# EAGLE board SensorBoard (EAGLE 9.4.0)
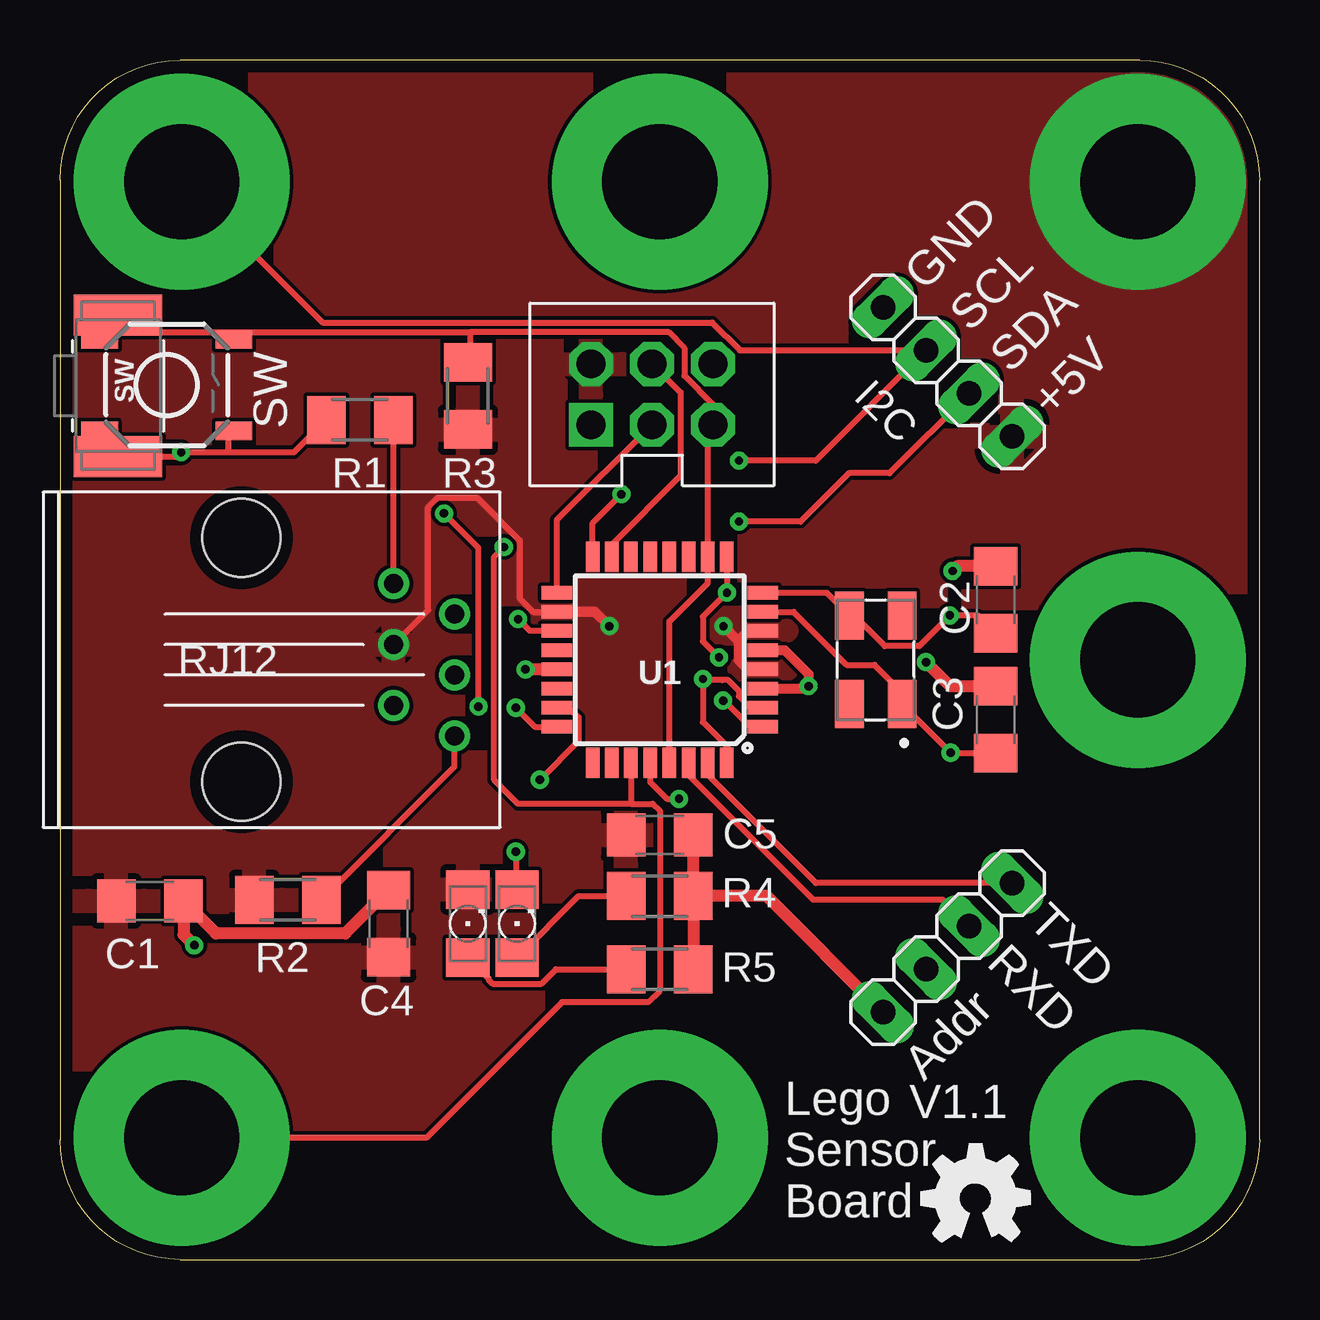
[diagram p0: board, top side]
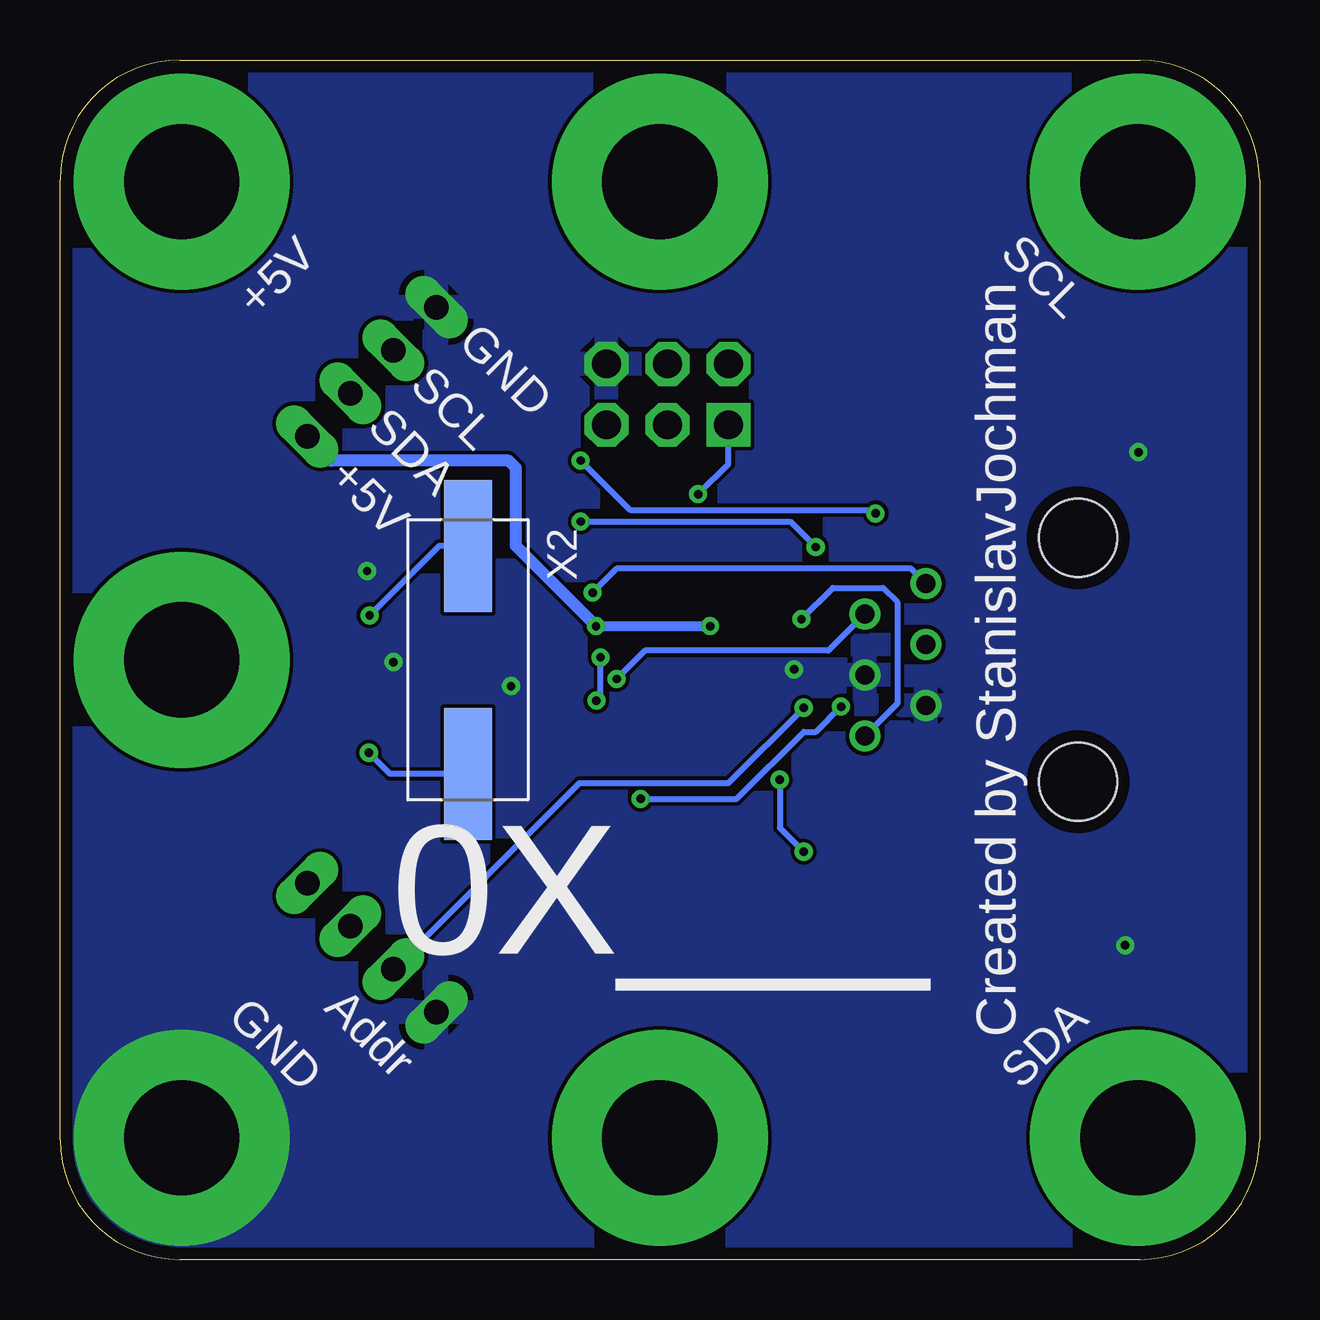
[diagram p1: board, bottom side, seen from below]

Size 50 x 50 mm. Coordinates in mm from the lower left corner, seen from the top.
Outline: 5,0 45,0 arc90 50,5 50,45 arc90 45,50 5,50 arc90 0,45 0,5 arc90 5,0
Copper layers (1*16): Top 0.035mm / dielectric 1.5mm / Bottom 0.035mm
Design rules "default *": minimum track width 6mil, minimum drill 0.35mm, track to track 6mil, track to pad 6mil, pad to pad 6mil, via to via 6mil, smd to smd 6mil, copper to edge 20mil, drill to drill 6mil, minimum pad ring 10mil, minimum via ring 8mil, stop-mask expansion 4mil, vias tented up to drill 0mil, thermal gap 10mil

## Footprints (pad centres in the part's own frame; a part is rotated, then mirrored left to right if it is on the bottom)
C1206 = smd 1.6 x 1.8: 1 -1.4,0; 2 1.4,0
1X04 = drill 1.016 long: 1 -3.81,0; 2 -1.27,0; 3 1.27,0; 4 3.81,0
ICSP_HEADER = drill 1.2 pad 1.829 square: 1 -1.27,2.54 | drill 1.2 pad 1.829 octagon: 2 1.27,2.54; 3 -1.27,0; 4 1.27,0; 5 -1.27,-2.54; 6 1.27,-2.54
1206 = smd 1.6 x 1.803: A -1.422,0; C 1.422,0
M1206 = smd 1.6 x 2: 1 -1.4,0; 2 1.4,0
RJ12 = drill 0.8: 1 -8.89,-3.175; 2 -6.35,-1.905; 3 -8.89,-0.635; 4 -6.35,0.635; 5 -8.89,1.905; 6 -6.35,3.175 | hole 3.25: 0,-5.08; 0,5.08
BTN_CK_KSS = smd 1.7 x 3.7: P$1 -2.95,0; P$2 2.95,0
TACTILE_SWITCH_SMD_5.2MM = smd 1.524 x 0.762: 1 -2.794,1.905; 2 2.794,1.905; 3 -2.794,-1.905; 4 2.794,-1.905
TQFP32-08 = smd 1.27 x 0.559: 1 -4.293,2.8; 2 -4.293,2; 3 -4.293,1.2; 4 -4.293,0.4; 5 -4.293,-0.4; 6 -4.293,-1.2; 7 -4.293,-2; 8 -4.293,-2.8; 17 4.293,-2.8; 18 4.293,-2; 19 4.293,-1.2; 20 4.293,-0.4; 21 4.293,0.4; 22 4.293,1.2; 23 4.293,2; 24 4.293,2.8 | smd 0.559 x 1.27: 9 -2.8,-4.293; 10 -2,-4.293; 11 -1.2,-4.293; 12 -0.4,-4.293; 13 0.4,-4.293; 14 1.2,-4.293; 15 2,-4.293; 16 2.8,-4.293; 25 2.8,4.293; 26 2,4.293; 27 1.2,4.293; 28 0.4,4.293; 29 -0.4,4.293; 30 -1.2,4.293; 31 -2,4.293; 32 -2.8,4.293
LEGO-1X1 = drill 4.8 pad 9: LEGO 0,0
7B-16.000MAAJ-T = smd 2 x 1.2: 1 -1.85,-1.1; 2 1.85,-1.1; 3 1.85,1.1; 4 -1.85,1.1
FC4SDCBMF16.0-T1 = smd 5.5 x 2: 1 -4.75,0; 2 4.75,0

## Placement (x,y rotation side)
C1  100nf  [C1206]  3.75,14.95 0 top
C2  22pf  [C1206]  39,27.5 90 top
C3  22pf  [C1206]  39,22.5 90 top
C4  100nf  [C1206]  13.7,14 90 top
C5  100uf  [C1206]  25,17.7 0 top
I2C  [1X04]  37,37 135 top
JP1  [ICSP_HEADER]  24.68,36.06 90 top
LED1  POWER  [1206]  17,14 90 top
LED2  STATUS  [1206]  19.05,14 90 top
R1  10K  [M1206]  12.5,35 0 top
R2  1K  [M1206]  9.5,15 0 top
R3  10K  [M1206]  17,36 270 top
R4  1K  [M1206]  25,15.15 0 top
R5  1K  [M1206]  25,12.1 0 top
RJ12  RJ12  [RJ12]  7.56,25 0 bottom
SW  [BTN_CK_KSS]  2.42,36.42 270 top
SW1  [TACTILE_SWITCH_SMD_5.2MM]  4.45,36.45 0 top
U1  ATMEGA328P_TQFP  [TQFP32-08]  25,25 180 top
U$1  LEGO-1X1  [LEGO-1X1]  5.07,44.92 0 top
U$2  OPENSOURCE  [OSHW_5MM]  38.16,2.54 0 top
U$3  LEGO-1X1  [LEGO-1X1]  5.07,5.07 0 top
U$4  LEGO-1X1  [LEGO-1X1]  44.92,5.07 0 top
U$5  LEGO-1X1  [LEGO-1X1]  44.92,44.92 0 top
U$6  LEGO-1X1  [LEGO-1X1]  25,5.07 0 top
U$7  LEGO-1X1  [LEGO-1X1]  25,44.92 0 top
U$9  LEGO-1X1  [LEGO-1X1]  44.92,25 0 top
UART  [1X04]  37,13 225 top
X1  7B-16.000MAAJ-T  [7B-16.000MAAJ-T]  34,25 90 top
X2  FC4SDCBMF16.0-T1  [FC4SDCBMF16.0-T1]  33,25 270 bottom

## Library data of the parts
C1-C5 = rcl; SPICEPREFIX: C
I2C UART = pinhead
JP1 U$1-U$7 U$9 = Cing Library
LED1 LED2 = led
R1-R5 = rcl; SPICEPREFIX: R
RJ12 = con-rj
SW = adafruit
SW1 = SparkFun-Switches; PROD_ID: SWCH-08247; SF_SKU: COM-08720
U1 = SparkFun-IC-Microcontroller; PROD_ID: IC-09069
X1 = Crystals; CRAETED_BY: PCBLayout.com; DIGIKEY_PART_NUMBER: 887-1104-2-ND; MANUFACTURER: TXC CORPORATION; MPN: 7B-16.000MAAJ-T; PACKAGE: SMD 4
X2 = Crystals; CREATED_BY: PCBLayout.com; DIGIKEY_PART_NUMBER: 631-1017-2-ND; MANUFACTURER: Fox Electronics; MPN: FC4SDCBMF16.0-T1; PACKAGE: SMD

## Nets
+5V: C1.1 C4.1 C5.1 I2C.1 JP1.2 LED1.C R2.1 R3.2 RJ12.4 U1.4 U1.6 U1.18 U$5.LEGO
ADDR_SENSE: U1.24 UART.3
GND: C1.2 C2.2 C3.2 C4.2 C5.2 I2C.4 JP1.6 R1.1 R4.2 R5.2 RJ12.2 RJ12.3 SW1.3 SW1.4 SW.P$2 U1.3 U1.5 U1.21 U$4.LEGO UART.4
MISO: JP1.1 U1.16
MOSI: JP1.4 U1.15
N$1: C2.1 U1.8 X1.3 X2.1
N$2: C3.1 U1.7 X1.1 X2.2
N$3: LED2.A R4.1
N$4: LED1.A R5.1
RESET: JP1.5 R3.1 SW1.1 SW1.2 SW.P$1 U1.10 U1.29
RXD: U1.30 UART.2
S_A: R2.2 RJ12.1 U1.19
S_RX: RJ12.5 U1.2 U1.32
S_TX: R1.2 RJ12.6 U1.1 U1.9
SCK: JP1.3 U1.17
SCL: I2C.3 U1.28 U$1.LEGO
SDA: I2C.2 U1.27 U$3.LEGO
STATUS: LED2.C U1.23
TXD: U1.31 UART.1

## Tracks (layer width: path | path; a pad name or v marks a point on that pad's centre or on a via)
+5V  (via drill 0.35)
  Top 0.254: U1.18 19.71,27 19.16,27.56 19.16,29.97 17.38,31.75 15.73,31.75 15.35,31.37 15.35,27.07 RJ12.4
  Top 0.406: U1.6 28.68,26.2 28.3,25.83 | U1.4 28.68,24.6 28.3,24.97 28.3,25.83 | 28.3,25.83 28.23,25.83 v27.66,26.4 | v22.9,26.4 22.3,27 U1.18
  Bottom 0.406: v27.66,26.4 v22.9,26.4
  Bottom 0.508: v27.66,26.4 31,29.74 31,33 31.3,33.3 38.69,33.3 I2C.1
  pour Top: -5,55 55,55 55,-5 -5,-5
ADDR_SENSE  (via drill 0.35)
  Top 0.254: v19,23 19.8,22.2 U1.24
  Bottom 0.254: v19,23 22.14,19.86 28.35,19.86 UART.3
GND  (via drill 0.35)
  Top 0.254: R1.1 9.75,33.65 7,33.65 | 7,33.65 v5.05,33.65 4.87,33.47 SW.P$2 1.66,34.23 SW1.3 | 29.39,23.9 U1.3 | SW1.4 7,34.3 7,33.65
  Top 0.406: U1.5 30.2,25.4 31.2,24.4 v31.2,23.9 31.1,23.8 U1.3
  Top 0.508: 14.1,15.8 C4.2 11.89,13.59 6.51,13.59 C1.2 5.15,13.55 v5.6,13.1 | C2.2 37.4,28.9 v37.2,28.7 | 38.9,23.8 C3.2 37.1,23.9 v36.1,24.9 | U1.21 v19.4,24.6 | UART.4 29.46,15.15 R4.2 | R4.2 C5.2 | R4.2 R5.2
  pour Bottom: -5,55 55,55 55,-5 -5,-5
MISO  (via drill 0.35)
  Top 0.254: U1.16 22.2,30.7 v23.4,31.9
  Bottom 0.254: v23.4,31.9 22.14,33.16 JP1.1
MOSI
  Top 0.254: U1.15 23,29.81 25.87,32.69 25.87,36.14 JP1.4
N$1  (via drill 0.35)
  Top 0.254: U1.8 31.95,27.8 X1.3 33.11,26.85 34.38,25.57 35.82,25.57 v37.09,26.85 38.25,26.85 C2.1
  Bottom 0.254: X2.1 34.2,29.75 v37.09,26.85
N$2  (via drill 0.35)
  Top 0.254: v37.12,21.12 X1.1 35.1,23.64 33.95,24.79 32.79,24.79 30.58,27 U1.7 | v37.12,21.12 37.15,21.1 | v37.12,21.12 38.98,21.12 C3.1
  Bottom 0.254: X2.2 36.25,20.25 v37.12,21.12
N$3
  Top 0.254: LED2.A 21.62,15.15 R4.1
N$4
  Top 0.254: R5.1 20.67,12.1 20.07,11.5 18.03,11.5 17.87,11.66 17.87,11.71 LED1.A
RESET
  Top 0.254: 2.5,39.37 SW.P$1 | 2.5,39.37 3.22,38.65 7,38.65 | 17.1,38.65 25.38,38.65 26.03,38 26.03,36.84 27.22,35.64 JP1.5 27,34.57 U1.10 27,28.2 25.4,26.6 U1.29 | 7,38.65 17.1,38.65 | 17.1,38.65 17.1,37.5 R3.1 | SW1.2 7,38.6 7,38.65 | SW1.1 2.5,39.2 2.5,39.37
RXD
  Top 0.254: UART.2 36.8,15 31.4,15 26.2,20.2 U1.30
S_A  (via drill 0.35)
  Top 0.254: R2.2 16.45,20.55 RJ12.1 | U1.19 19.59,26.2 v19.09,26.69
  Bottom 0.254: v19.09,26.69 17.79,28 15.7,28 15.1,27.4 15.1,23.17 RJ12.1
S_RX  (via drill 0.35)
  Top 0.254: U1.2 28.78,23 28.3,23.48 28.3,23.7 27.85,24.15 27.6,24.15 26.85,24.15 v26.8,24.2 26.8,22.4 27.8,21.4 U1.32
  Bottom 0.254: RJ12.5 17.98,25.38 25.62,25.38 v26.8,24.2
S_TX  (via drill 0.35)
  Top 0.254: U1.9 v27.8,27.8 26.8,26.8 26.8,25.77 v27.47,25.1 | R1.2 13.91,35.13 RJ12.6 | v27.64,23.3 27.68,23.3 28.78,22.2 U1.1
  Bottom 0.254: v27.64,23.3 27.47,23.47 v27.47,25.1 | RJ12.6 14.53,28.8 26.8,28.8 v27.8,27.8
SCK
  Top 0.254: U1.17 20.71,30.82 JP1.3
SCL  (via drill 0.35)
  Top 0.254: U$1.LEGO 10.94,39.06 27.18,39.06 28.34,37.9 I2C.3 31.5,33.3 v28.3,33.3 | v16,31.1 17.44,29.66 v17.44,23.05 | U1.28 24.6,19.9 25.3,19.2 v25.8,19.2
  Bottom 0.254: v28.3,33.3 26.24,31.24 16.15,31.24 v16,31.1 | v25.8,19.2 21.8,19.2 19,22 18.49,22 v17.44,23.05
SDA  (via drill 0.35)
  Top 0.254: U1.27 23.8,19 | U$3.LEGO 15.28,5.07 20.92,10.72 24.52,10.72 25,11.21 25,18.7 24.7,19 23.8,19 | I2C.2 34.58,32.78 32.88,32.78 30.87,30.76 v28.3,30.76 | v18.5,29.7 18.1,29.3 18.1,20 19.1,19 23.8,19
  Bottom 0.254: v28.3,30.76 19.56,30.76 v18.5,29.7
STATUS  (via drill 0.35)
  Top 0.254: v20,20 21.62,21.62 21.62,22.59 21.22,23 U1.23 | v19,17 19,15.47 LED2.C
  Bottom 0.254: v20,20 20,18 v19,17
TXD
  Top 0.254: UART.1 31.5,15.69 27,20.2 U1.31

## Text on the board
tNames: GND | SCL | SDA | +5V | SW | TXD | RXD | Addr | V1.1 | Lego / Sensor / Board
bNames: SCL | +5V | GND | SCL | SDA | +5V | Created by StanislavJochman | 0X___ | SDA | Addr | GND